# EAGLE board 5Wled-mosfet_2 (EAGLE 6.2)
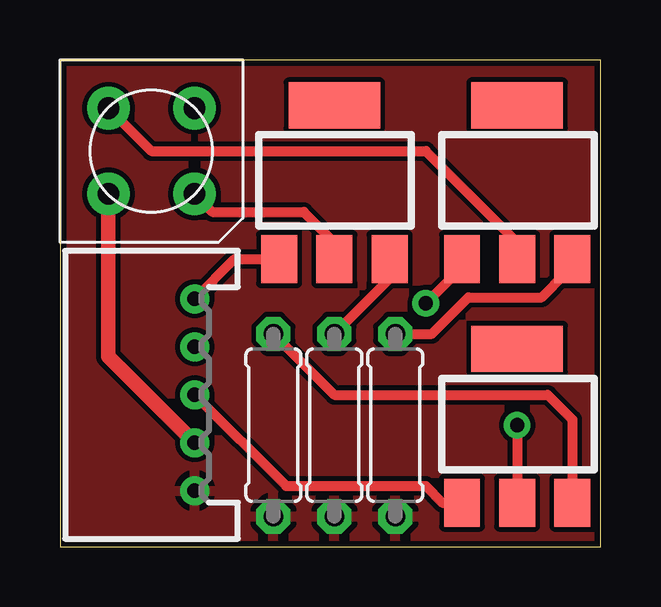
[diagram p0: board, top side]
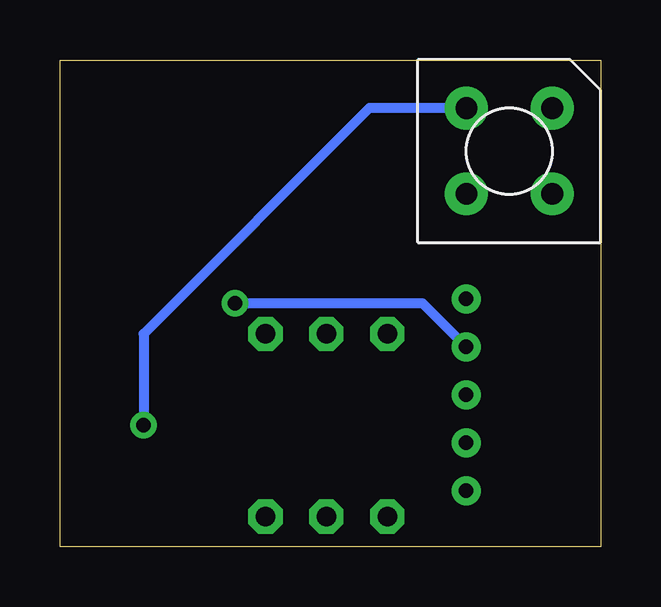
[diagram p1: board, bottom side, seen from below]

Size 22.53 x 20.31 mm. Coordinates in mm from the lower left corner, seen from the top.
Outline: 0,0 22.53,0 22.53,20.31 0,20.31 0,0
Copper layers (1*16): Top 0.035mm / dielectric 1.5mm / Bottom 0.035mm
Design rules: minimum track width 8mil, minimum drill 20mil, track to track 8mil, track to pad 8mil, pad to pad 8mil, via to via 8mil, smd to smd 8mil, copper to edge 10mil, drill to drill 8mil, minimum pad ring 12mil, minimum via ring 10mil, stop-mask expansion 4mil, vias tented up to drill 25mil, thermal gap 10mil

## Footprints (pad centres in the part's own frame; a part is rotated, then mirrored left to right if it is on the bottom)
5WRGBLED = drill 0.9 pad 1.778: 1 -1.79,1.79; 2 -1.79,-1.79; 3 1.79,-1.79; 4 1.79,1.79
DF3R-05 = drill 0.6: 1 -4,1.8; 2 -2,1.8; 3 0,1.8; 4 2,1.8; 5 4,1.8
SOT-223 = smd 1.499 x 2.007: 1 -2.3,-3.235; 2 0,-3.235; 3 2.3,-3.235 | smd 3.81 x 1.93: 4 0,3.175
0207/7 = drill 0.813 octagon: 1 -3.81,0; 2 3.81,0

## Placement (x,y rotation side)
LED1  RGBLED_CA4.5MM  [5WRGBLED]  3.81,16.51 180 top
PL1  [DF3R-05]  3.81,6.35 270 top
Q1  IRLL024  [SOT-223]  11.43,15.24 0 top
Q2  IRLL024  [SOT-223]  19.05,5.08 0 top
Q3  IRLL024  [SOT-223]  19.05,15.24 0 top
R1  [0207/7]  11.43,5.08 270 top
R2  [0207/7]  13.97,5.08 270 top
R3  [0207/7]  8.89,5.08 270 top

## Library data of the parts
LED1 R1-R3 = adafruit
PL1 = con-hirose-df3
Q1-Q3 = transistors

## Nets
BLUE: PL1.1 Q1.1
GND: PL1.5 R1.2 R2.2 R3.2
GREEN: PL1.2 Q3.1
N$1: LED1.1 Q1.2
N$2: LED1.3 Q3.2
N$3: LED1.2 Q2.2
N$4: Q1.3 R1.1
N$5: Q3.3 R2.1
N$6: Q2.3 R3.1
RED: PL1.3 Q2.1
VCC: LED1.4 PL1.4

## Tracks (layer width: path | path; a pad name or v marks a point on that pad's centre or on a via)
BLUE
  Top 0.406: PL1.1 7.27,12 Q1.1
GND
  pour Top: 0,20.32 22.86,20.32 22.86,0 0,0
GREEN  (via drill 0.6)
  Top 0.406: v15.24,10.16 16.75,11.67 Q3.1
  Bottom 0.406: PL1.2 7.42,10.16 v15.24,10.16
N$1
  Top 0.406: LED1.1 6.35,13.97 10.16,13.97 11.43,12.7 Q1.2
N$2
  Top 0.406: LED1.3 3.81,16.51 15.24,16.51 19.05,12.7 Q3.2
N$3  (via drill 0.6)
  Top 0.406: v19.05,5.08 Q2.2
  Bottom 0.406: LED1.2 9.64,18.3 19.05,8.89 v19.05,5.08
N$4
  Top 0.406: R1.1 13.73,11.19 Q1.3
N$5
  Top 0.406: R2.1 15.49,8.89 17.02,10.41 20.07,10.41 21.08,11.43 21.08,11.74 Q3.3
N$6
  Top 0.406: R3.1 11.43,6.35 20.32,6.35 21.35,5.32 Q2.3
RED
  Top 0.406: PL1.3 9.42,2.54 15.24,2.54 15.93,1.84 Q2.1
VCC
  Top 0.61: LED1.4 2.02,7.94 PL1.4